# EAGLE board neojoint1-180 (EAGLE 6.6.0)
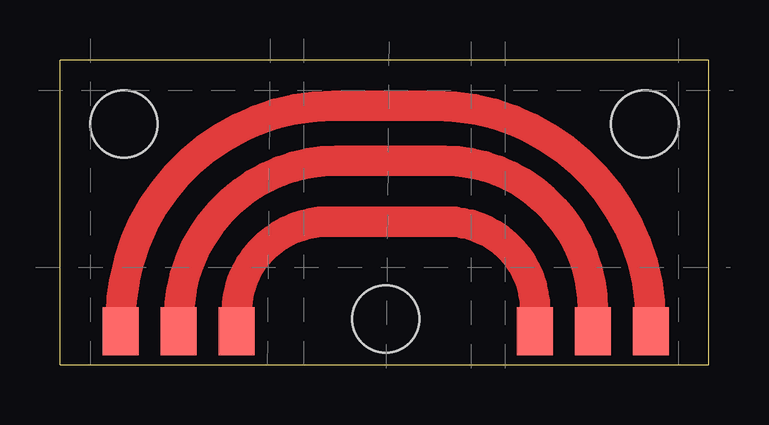
[diagram p0: board, top side]

Size 27.05 x 12.7 mm. Coordinates in mm from the lower left corner, seen from the top.
Outline: 0,0 27.05,0 27.05,12.7 0,12.7 0,0
Copper layers (1*16): Top 0.035mm / dielectric 1.5mm / Bottom 0.035mm
Design rules "default": minimum track width 10mil, minimum drill 24mil, track to track 8mil, track to pad 8mil, pad to pad 8mil, via to via 8mil, smd to smd 8mil, copper to edge 40mil, drill to drill 8mil, minimum pad ring 10mil, minimum via ring 8mil, stop-mask expansion 4mil, vias tented up to drill 0mil, thermal gap 10mil
Holes 2.8 mm at 2.67,10.03 24.38,10.03 13.59,1.91

## Footprints (pad centres in the part's own frame; a part is rotated, then mirrored left to right if it is on the bottom)
PAD-1.5X4.5 = smd 1.5 x 2: P$1 0,0

## Placement (x,y rotation side)
J1  [PAD-1.5X4.5]  7.37,1.4 0 top
J2  [PAD-1.5X4.5]  4.95,1.4 0 top
J3  [PAD-1.5X4.5]  24.64,1.4 180 top
J4  [PAD-1.5X4.5]  19.81,1.4 180 top
J5  [PAD-1.5X4.5]  22.23,1.4 180 top
J6  [PAD-1.5X4.5]  2.54,1.4 0 top

## Library data of the parts
J1-J6 = SparkFun-Connectors

## Nets
A: J1.P$1 J4.P$1
B: J2.P$1 J5.P$1
C: J3.P$1 J6.P$1

## Tracks (layer width: path | path; a pad name or v marks a point on that pad's centre or on a via)
A
  Top 1.27: J4.P$1 19.81,2.29 arc90 16.13,5.97 11.18,5.97 arc90 7.37,2.16 J1.P$1
B
  Top 1.27: J2.P$1 4.95,1.91 arc-90 11.56,8.51 16,8.51 arc-90 22.23,2.29 J5.P$1
C
  Top 1.27: 2.41,1.52 J6.P$1 2.54,1.91 arc-90 11.43,10.79 15.62,10.79 arc-90 24.64,1.78 J3.P$1

## Text on the board
tDocu: neojoint1-0180